# Altium PCB Board.PcbDoc
Units mil, origin at the board's own origin, x right, y up, seen from the top; angles counter-clockwise.
Board outline 760 x 1365 mil, 2 copper layers (Top Layer, Bottom Layer); 29 components, 22 nets, 136 pads, 50 vias.
Unrouted connection lines stored in the file: 3.
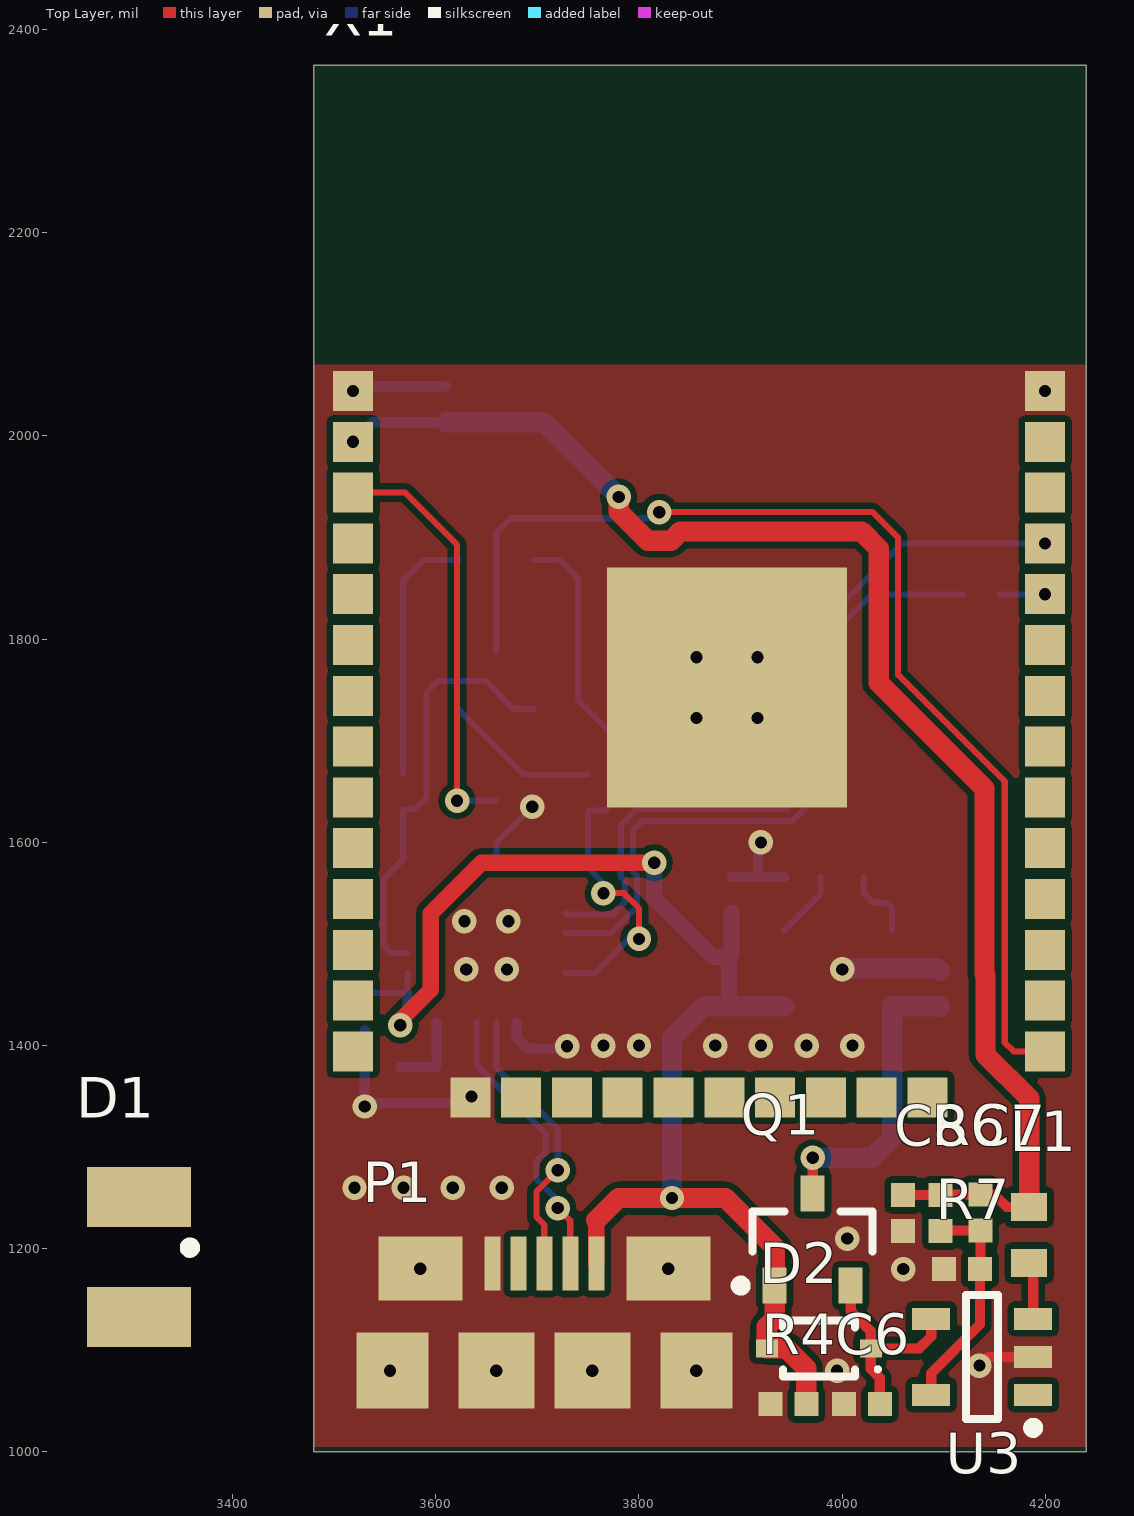
[diagram p0: Top Layer view]
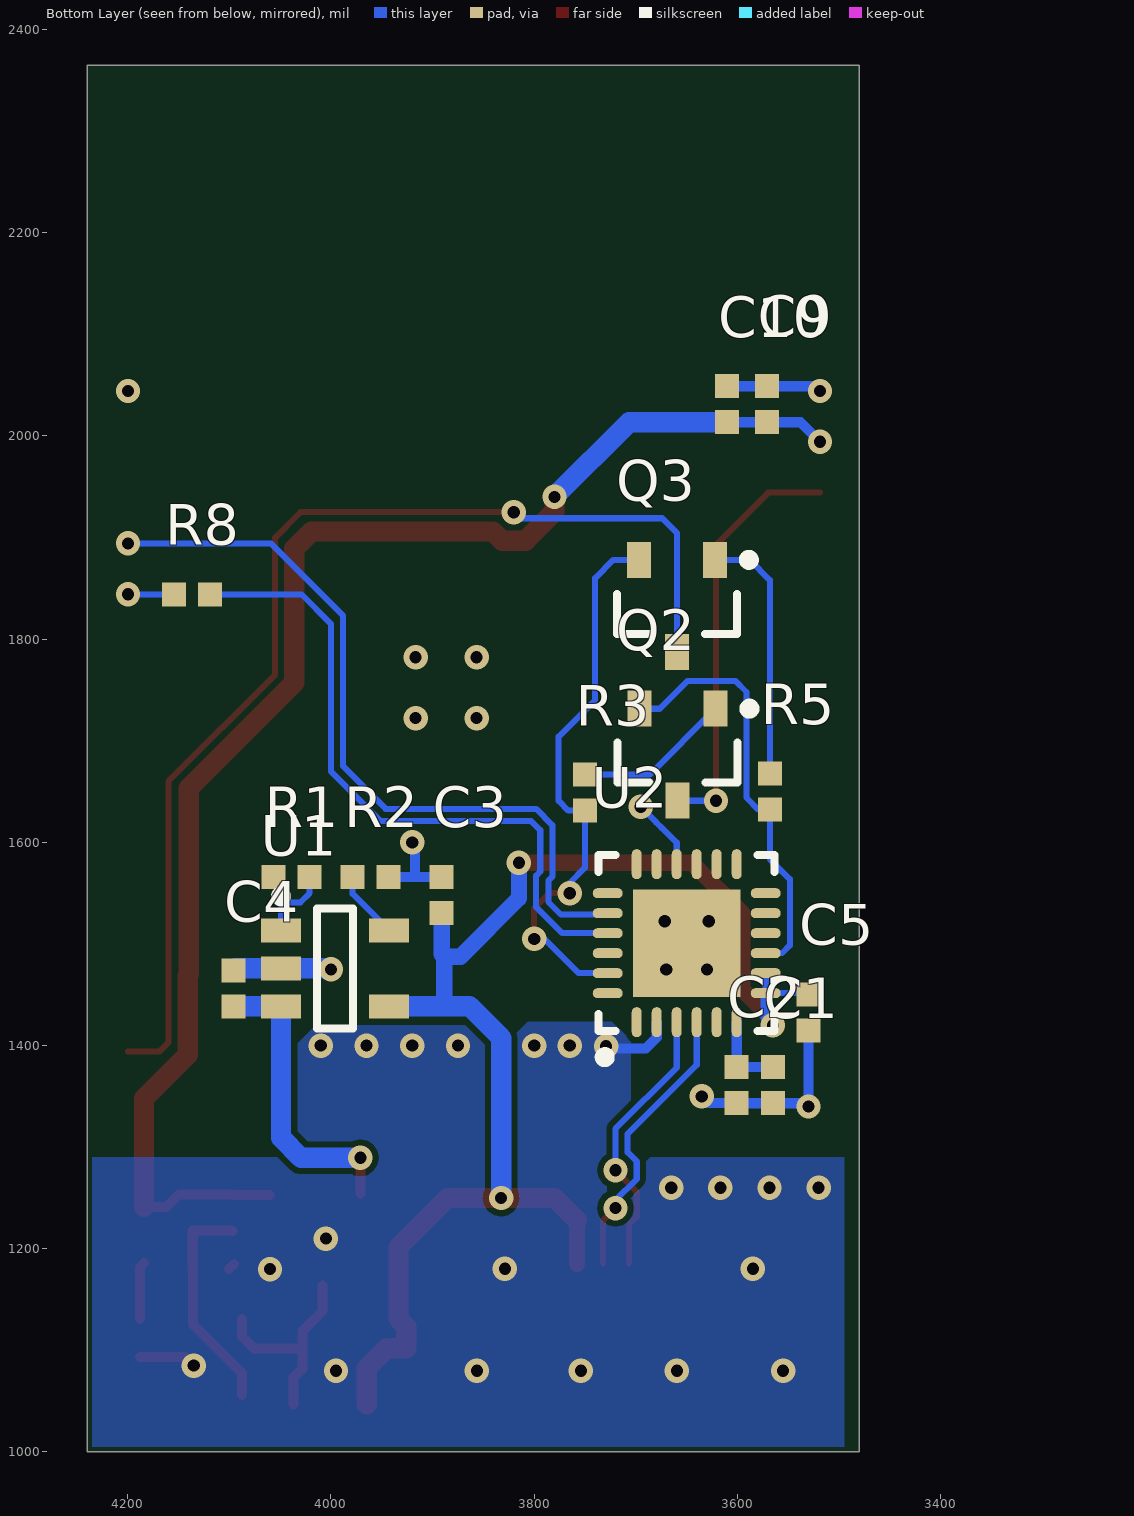
[diagram p1: Bottom Layer view, seen from below]

## Layer stack, top to bottom
Top Solder: solder mask 0.4, Solder Resist, Dk 3.5
Top Layer: signal copper 1.4
Dielectric 1: dielectric 12.6, FR-4, Dk 4.8
Bottom Layer: signal copper 1.4
Bottom Solder: solder mask 0.4, Solder Resist, Dk 3.5

## Board outline
3480,1000 4240,1000 4240,2365 3480,2365

## Design rules (kind name [scope] priority, off if disabled: settings)
Clearance [All] p1: gap=6 ignorepadtopadclearanceinfootprint=FALSE except(0: Arc-Hole Track-Hole SMDPad-Hole THPad-Hole Via-Hole Fill-Hole Poly-Hole Region-Hole Text-Hole)
PolygonConnect PolygonConnect_1 [InNetClass('PWR')] p1: connectstyle=Direct reliefconductorwidth=10 reliefentries=4 polygonreliefangle="90 Angle" airgapwidth=10
PolygonConnect [All] p2: connectstyle=Relief reliefconductorwidth=10 reliefentries=4 polygonreliefangle="90 Angle" airgapwidth=10
RoomDefinition Sheet1 [InComponentClass('Sheet1')] p1: confinementstyle=ConfineIn formatcopy=TRUE lockcomponents=FALSE outline 1005,1000 6995,1000 6995,4995 1005,4995
RoutingVias [All] p1: holewidth=12 width=24 viastyle="Through Hole" minholewidth=12 minwidth=24 maxholewidth=12 maxwidth=24
SolderMaskExpansion [All] p1: expansion=4
Width [All] p1: maxlimit=20 minlimit=6 preferedwidth=6 minimp=50.000000 maximp=50.000000 favimp=50.000000
30 further rules are at their usual default settings.

## Classes and differential pairs
net class PWR: 3.3V GND VBAT VBUS

## Components (designator, comment, footprint, x,y, rotation, side; value= is the part's Value field where it differs from the comment)
C1 "cap_single_np" chip_0402 3565,1361 r270 bottom
C2 "cap_single_np" chip_0402 3601,1361.28 r270 bottom
C3 "cap_single_np" chip_0402 3891,1548.28 r90 bottom
C4 "cap_single_np" chip_0402 4096,1456 r90 bottom
C5 "cap_single_np" chip_0402 3530,1432.72 r270 bottom
C6 "cap_single_np" chip_0402 4019.28,1047 r180 top
C7 "cap_single_np" chip_0402 4136,1235.72 r270 top
C8 "cap_single_np" chip_0402 4060,1235.28 r270 top
C9 "cap_single_np" chip_0402 3571,2031.28 r90 bottom
C10 "cap_single_np" chip_0402 3610,2031.28 r90 bottom
D1 "diode_4" plcc-2 3308,1251.11 r180 top
D2 "diode_2" sod323_0 3977,1102 r180 top
L1 "ind_1" chip_0603 4184,1213.56 r90 top
P1 "usb_micro_b" 10118192 3706.76,1185.32 r0 top
Q1 "p-mosfet_1" sot-23-3 3971,1209 r90 top
Q2 "npn-bjt_0" sot-23-3 3659,1686.28 r270 bottom
Q3 "npn-bjt_0" sot-23-3 3659.6,1832.72 r270 bottom
R1 "res_single" chip_0402 4038.72,1566 r180 bottom
R2 "res_single" chip_0402 3961,1566 r180 bottom
R3 "res_single" chip_0402 3750,1649 r90 bottom
R4 "res_single" chip_0402 3947,1047 r180 top
R5 "res_single" chip_0402 3568,1650 r90 bottom
R6 "res_single" chip_0402 4097,1235.28 r270 top
R7 "res_single" chip_0402 4118,1180 r180 top
R8 "res_single" chip_0402 4137,1844 r0 bottom
U1 "MCP73831" sot-23-5 3996,1476 r180 bottom
U2 "CP2104" QFN-24-4x4 3649.84,1500.76 r90 bottom
U3 "*" sot-25 4137.8,1093.6 r180 top
X1 "*" ESP32_WROOM 3518.65,1394.28 r0 top

## Footprints (in the part's own frame and the unit in brackets; to place one, negate y for a bottom-side part, rotate by r counter-clockwise, add the part's x,y. Pads: shape width x height; smd on the part's side, far side on the other; paste and mask are expansions set on the pad)
10118192 [mm] "USB Micro B Type Receptacle"
  rect 0.4x1.35 smd: 1(1.3,0) 2(0.65,0) 3(0,0) 4(-0.65,0) 5(-1.3,0)
  rect 1.8x1.9 smd: PAD(-3.8,-2.675) PAD(3.8,-2.675)
  rect 2.1x1.6 smd: PAD(-3.1,-0.125) PAD(3.1,-0.125)
  rect 1.9x1.9 smd: PAD(-1.2,-2.675) PAD(1.2,-2.675)
chip_0402 [mm]
  rect 0.6x0.6 smd: 1(-0.45,0) 2(0.45,0)
  body extent -0.55,-0.3 0.55,0.3, height 0.6
chip_0603 [mm]
  rect 0.7x0.9 smd: 1(-0.7,0) 2(0.7,0)
  body extent -0.85,-0.45 0.85,0.45, height 0.6
ESP32_WROOM [mm] "ESP32 WROOM Module Board"
  rect 1x1 smd: 1(0,16.51) 2(0,15.24) 3(0,13.97) 4(0,12.7) 5(0,11.43) 6(0,10.16) 7(0,8.89) 8(0,7.62) 9(0,6.35) 10(0,5.08) 11(0,3.81) 12(0,2.54) 13(0,1.27) 14(0,0) 15(2.93,-1.15) 16(4.2,-1.15) 17(5.47,-1.15) 18(6.74,-1.15) 19(8.01,-1.15) 20(9.28,-1.15) 21(10.55,-1.15) 22(11.82,-1.15) 23(13.09,-1.15) 24(14.36,-1.15) 25(17.3,0) 26(17.3,1.27) 27(17.3,2.54) 28(17.3,3.81) 29(17.3,5.08) 30(17.3,6.35) 31(17.3,7.62) 32(17.3,8.89) 33(17.3,10.16) 34(17.3,11.43) 35(17.3,12.7) 36(17.3,13.97) 37(17.3,15.24) 38(17.3,16.51)
  rect 6x6 smd: PAD(9.35,9.1)
plcc-2 [mm]
  rect 2.6x1.5 smd: 1(0,0) 2(0,3)
  silkscreen extent -1.4,1.14 -1.14,1.4
QFN-24-4x4 [mm] "QFN, 24-Leads, Body 4.00x4.00mm, Pitch 0.50mm, Thermal Pad 2.68x2.68mm, IPC Medium Density"
  oval 0.75x0.25 smd: 1(-1.975,1.25) 2(-1.975,0.75) 3(-1.975,0.25) 4(-1.975,-0.25) 5(-1.975,-0.75) 6(-1.975,-1.25) 13(1.975,-1.25) 14(1.975,-0.75) 15(1.975,-0.25) 16(1.975,0.25) 17(1.975,0.75) 18(1.975,1.25)
  oval 0.25x0.75 smd: 7(-1.25,-1.975) 8(-0.75,-1.975) 9(-0.25,-1.975) 10(0.25,-1.975) 11(0.75,-1.975) 12(1.25,-1.975) 19(1.25,1.975) 20(0.75,1.975) 21(0.25,1.975) 22(-0.25,1.975) 23(-0.75,1.975) 24(-1.25,1.975)
  rect 2.68x2.68 smd: 25(0,0)
  silkscreen extent -2.97,-2.2 2.2,2.2, body extent -2.05,-2.05 2.05,2.05, height 0.8
sod323_0 [mm] "SOD-323, 1.25mm x 1.7mm"
  rect 0.55x0.45 smd: 1(-1.3,0) 2(1.3,0)
  silkscreen extent -1.53,-0.7 0.9,0.7, body extent -0.9,-0.67 0.9,0.67, height 1
sot-23-3 [mm] "SOT-23-3 package"
  rect 0.9x0.6 smd: 1(-1.15,0.95) 2(-1.15,-0.95) 3(1.15,0)
  silkscreen extent -1.27,-1.5 0.7,1.92, body extent -0.7,-1.52 0.7,1.52, height 1.1
sot-23-5 [mm] "SOT23, 5-Leads, Body 2.90x2.80mm, Pitch 0.95mm, IPC Medium Density"
  rect 1x0.6 smd: 1(-1.35,0.95) 2(-1.35,0) 3(-1.35,-0.95) 4(1.35,-0.95) 5(1.35,0.95)
  silkscreen extent -1.48,-1.5 0.45,1.92, body extent -0.85,-1.5 0.85,1.5, height 1.1
sot-25 [mm] "SOT23 Package"
  rect 0.95x0.55 smd: 1(-1.275,0.95) 2(-1.275,0) 3(-1.275,-0.95) 4(1.275,-0.95) 5(1.275,0.95)
  silkscreen extent -1.4,-1.55 0.4,1.9, body extent -0.85,-1.55 0.85,1.55, height 1.4

## Part data
C1 C9: library part CAP-00127, "CAP, 4.7uF, 10%, 16V, X7R, 0805", Capacitance=4.7uF, Manufacturer=Murata, Manufacturer PN=GRM21BR71C475KA73L, Tolerance=10%, Voltage Rating=16V, Part Number=CAP-00127, Type=X7R
C2 C10: library part CAP-00069, "CAP, 0.10uF, 10%, 16V, X7R, 0805", Capacitance=0.10uF, Manufacturer=Murata, Manufacturer PN=GRM219R71C104KA01D, Tolerance=10%, Voltage Rating=16V, Part Number=CAP-00069, Type=X7R
C3 C4 C6 C8: library part CAP-00131, "CAP, 10uF, 10%, 10V, X7R, 0805", Capacitance=10uF, Manufacturer=Murata, Manufacturer PN=GRM21BR71A106KA73L, Tolerance=10%, Voltage Rating=10V, Part Number=CAP-00131, Type=X7R
C5: library part CAP-00107, "CAP, 1uF, 10%, 16V, X7R, 0805", Capacitance=1uF, Manufacturer=Murata, Manufacturer PN=GRM21BR71C105KA01L, Tolerance=10%, Voltage Rating=16V, Part Number=CAP-00107, Type=X7R
C7: library part CAP-00426, "CAP, 22pF, ±1%, 50V, C0G, 0603", Capacitance=22pF, Manufacturer=Murata, Manufacturer PN=GRM1885C1H220FA01D, Tolerance=±1%, Voltage Rating=50V, Part Number=CAP-00426, Type=C0G
D1: library part DIO-00034, "LED, Orange, PLCC-4", Current Rating=20mA, Forward Voltage=1.9V, Manufacturer=Avago, Manufacturer PN=HSML-A101-S00J1, Part Number=DIO-00034, Type=LED
D2: library part DIO-00000, "Dio Shtky, 500mA, 0.62V, 30V, SOD-323", Current Rating=500mA, Forward Voltage=620mV, Manufacturer="ON Semi", Manufacturer PN=NSR0530HT1G, Reverse Breakdown Voltage=30V, Part Number=DIO-00000, Type=Schottky
L1: library part MAG-00030, "Ind, 2.2uH, 20%, 500mA, 0805", Current Rating=500mA, Inductance=2.2uH, Manufacturer=TDK, Manufacturer PN=MLZ1608N2R2LT000, Tolerance=20%, DCR="234 mOhm", Part Number=MAG-00030
P1: library part CONN-00011, "USB Micro B Type Receptacle", Current=1.8, Manufacturer=Amphenol, Manufacturer PN=10118192, Levels=1, Part Number=CONN-00011, Positions per level=5, Type="USB Micro B"
Q1: library part XSTR-00005, "XSTR PMOS, 2.2A, 30V,  Vgs 1.4V, SOT-23-3", Manufacturer="ON Semi", Manufacturer PN=NTR4171PT1G, Max Current=2.2A, Max Power=480mW, Max Voltage=30V, Part Number=XSTR-00005, Type=PFET, Vgs/Vce=1.4V
Q2 Q3: library part XSTR-00001, "XSTR NPN, 600mA, 40V, Vce 0.75V, SOT-23-3", Manufacturer="ON Semi", Manufacturer PN=MMBT4401LT3G, Max Current=600mA, Max Power=300mW, Max Voltage=40V, Part Number=XSTR-00001, Type=NPN, Vgs/Vce=0.75V
R1: library part RES-00240, "RES, 1k, 1%, 125mW, 0805", Manufacturer=Rohm, Manufacturer PN=MCR10EZHF1001, Power Rating=125mW, Resistance=1k, Tolerance=1%, Part Number=RES-00240
R2: library part RES-00273, "RES, 2k, 1%, 125mW, 0805", Manufacturer=Rohm, Manufacturer PN=MCR10ERTF2001, Power Rating=125mW, Resistance=2k, Tolerance=1%, Part Number=RES-00273
R3 R5: library part RES-00356, "RES, 10k, 1%, 125mW, 0805", Manufacturer=Rohm, Manufacturer PN=MCR10EZPF1002, Power Rating=125mW, Resistance=10k, Tolerance=1%, Part Number=RES-00356
R4: library part RES-00432, "RES, 47k, 1%, 125mW, 0805", Manufacturer=Rohm, Manufacturer PN=MCR10ERTF4702, Power Rating=125mW, Resistance=47k, Tolerance=1%, Part Number=RES-00432
R6: library part RES-00532, "RES, 365k, 1%, 125mW, 0805", Manufacturer=Rohm, Manufacturer PN=MCR10ERTF3653, Power Rating=125mW, Resistance=365k, Tolerance=1%, Part Number=RES-00532
R7: library part RES-00459, "RES, 82k, 1%, 125mW, 0805", Manufacturer=Rohm, Manufacturer PN=MCR10ERTF8202, Power Rating=125mW, Resistance=82k, Tolerance=1%, Part Number=RES-00459
R8: library part RES-00202, "RES, 470, 1%, 125mW, 0805", Manufacturer=Rohm, Manufacturer PN=MCR10ERTF4700, Power Rating=125mW, Resistance=470, Tolerance=1%, Part Number=RES-00202
U1: library part PWREG-00011, "Single Cell Li-Ion Batt Charger, MCP73831, SOT-23-5", Manufacturer=Microchip, Max Current=500mA, Voltage Range In="3.75 - 6V", Manufacturer PN=MCP73831, Part Number=PWREG-00011, Reg Type="Batt Chgr"
U2: library part IFACE-00003, "USB to UART Bridge CP2104", Manufacturer=SiLabs, Manufacturer PN=CP2104, Part Number=IFACE-00003
U3: library part PWREG-00000, "REG, SW Buck Adj, 1A, 1.5MHz", Frequency=1.5MHz, Manufacturer="Diodes Inc.", Manufacturer PN=AP3428, Max Current=1A, Voltage Range In="2.5 - 5.5V", Voltage Range Out="0.6 - 5.5V", Fixed/Adj=Adj, Part Number=PWREG-00000, Reg Type="SW Buck"
X1: library part MISC-00003, "ESP32_WROOM", Manufacturer=Espressif, Manufacturer PN=ESP32_WROOM, Part Number=MISC-00003

## Via types
v1: diameter 24, hole 12, Top Layer to Bottom Layer, 50 vias

## Nets (pads, with @x,y where several pads share a name; then routed paths per layer and width w, separated by ;. In a path a pad name is that pad's centre, name@x,y a point inside that pad or via, vN(x,y) a via of type N, cw(c..) or ccw(c..) an arc to the next point about the centre after c; other vN are vias at no path point)
3.3V: C7.1 C8.1 C9.1 C10.1 L1.2 R6.1 X1.2 | length 1431.4
  Top Layer w10: C8.1 R6.1 4097.43,1253.43 C7.1 4149.69,1253.43 4162,1241.12 L1.2
  Top Layer w20: v1(3780,1940) 3780,1925.4 3807.7,1897.7 3808.4,1897 3831.6,1897 3840.6,1906 4019,1906 4036,1889 4036,1757.13 4140,1653.13 4140,1470 4141,1469 4141,1391.03 4184,1348.03 L1.2
  Bottom Layer w10: v1(3518.65,1994.28) 3537.94,2013.57 C9.1 C10.1
  Bottom Layer w20: C10.1 3706.43,2013.57 v1(3780,1940)
GND: C1.2 C2.2 C3.2 C4.2 C5.2 C6.2 C8.2 C9.2 C10.2 P1.5 P1.PAD R2.2 R4.2 R7.2 U1.2 U2.2 U2.16 U2.25 U3.2 X1.1 X1.15 X1.38 X1.PAD | length 668.8
  Top Layer w10: X1.15 v1(3635,1350) ; R7.2@4095.28,1185 R7.2 ; v1(4135,1085) 4143.6,1093.6 U3.2
  Bottom Layer w6: U2.16 3659.68,1599.68 3674.28,1614.28 3674.54,1614.28 3679.81,1619.56 3679.81,1619.81 v1(3695,1635)
  Bottom Layer w10: v1(3518.65,2044.28) 3523.37,2049 C9.2 C10.2 ; C5.2 v1(3530,1340) 3533.28,1343.28 C1.2 3600.72,1343.28 C2.2 3628.57,1343.57 v1(3635,1350) ; U2.2 3679.37,1407.87 3690,1397.24 3727.24,1397.24 v1(3729.24,1399.24) ; C3.2 3917.14,1566 ; v1(3920,1600) 3917.14,1597.14 3917.14,1566 ; R2.2 3917.14,1566
  Bottom Layer w20: v1(4000,1475) 4001,1476 U1.2 4093.72,1476 C4.2
  other v1: 3555,1080 3659.51,1080 3754,1080 3856.36,1080 3995,1080 3584.71,1180.39 3828.8,1180.39 4060,1180 4005,1210 3520,1260 3568.33,1260 3616.67,1260 3665,1260 3765,1400 3800,1400 3875,1400 3920,1400 3965,1400 4010,1400 3630,1475 3670,1475 3628.19,1522.41 3671.5,1522.41 3856.65,1722.28 3916.65,1722.28 3856.65,1782.28 3916.65,1782.28 4199.75,2044.28
NetC1_1: C1.1 C2.1 U2.5 U2.6 | length 80.3
  Bottom Layer w10: C1.1 3565.28,1379 C2.1 3600.63,1379.37 U2.6
NetC6_1: C6.1 D2.1 Q1.2 U3.4 | length 210.2
  Top Layer w10: Q1.2 4008.4,1138.6 4028.18,1118.82 D2.1 ; C6.1 4037,1073 4028.18,1081.82 D2.1 ; U3.4 4087.61,1113.61 4076,1102 D2.1
NetC7_2: C7.2 R6.2 R7.1 U3.5 | length 221
  Top Layer w10: U3.5 4087.61,1077.61 4135.72,1125.72 R7.1 4136,1180.28 C7.2 4097.43,1218 R6.2
NetD1_1: D1.1 R1.1
NetL1_1: L1.1 U3.3 | length 56.7
  Top Layer w10: L1.1 4188,1182 U3.3
NetP1_2: P1.2 U2.4 | length 283.4
  Top Layer w6: v1(3720,1240) 3732.35,1227.65 P1.2
  Bottom Layer w6: U2.4 3640,1381.03 3708,1313.03 3708,1295 3699,1286 3699,1268.6 3720,1247.6 v1(3720,1240)
NetP1_3: P1.3 U2.3 | length 274.6
  Top Layer w6: P1.3 3706.76,1223.55 3699,1231.3 3699,1256.3 v1(3720,1277.3)
  Bottom Layer w6: U2.3 3659.68,1378.32 3720,1318 v1(3720,1277.3)
NetQ2_1: Q2.1 R3.2 | length 155.3
  Bottom Layer w6: Q2.1 3686.43,1666.72 R3.2
NetQ2_2: Q2.2 R5.1 U2.9 | length 421.9
  Bottom Layer w6: U2.9 3556.09,1490.91 3548.32,1498.68 3548.32,1563.89 3568,1583.57 R5.1 3579.28,1632.28 3591,1644 3591,1748 3602,1759 3649,1759 3676.45,1731.55 Q2.2
NetQ2_3: Q2.3 X1.3 | length 413.6
  Top Layer w6: X1.3 3569.72,1944.28 3621,1893 v1(3621,1641)
  Bottom Layer w6: v1(3621,1641) Q2.3
NetQ3_1: Q3.1 R5.2 | length 252.8
  Bottom Layer w6: R5.2 3568,1858 3588,1878 Q3.1
NetQ3_2: Q3.2 R3.1 U2.23 | length 559.5
  Top Layer w6: v1(3765,1550) 3785,1550 3800,1535 v1(3800,1505)
  Bottom Layer w6: Q3.2 3722,1878 3740,1860 3740,1740 3776,1704 3776,1641 3766.28,1631.28 R3.1 3750,1575 3765,1560 v1(3765,1550) ; U2.23 3756.23,1471.23 3790,1505 v1(3800,1505)
NetQ3_3: Q3.3 X1.25 | length 1115.2
  Top Layer w6: v1(3820,1925) 4030,1925 4055,1900 4055,1765 4160,1660 4160,1402.98 4168.7,1394.28 X1.25
  Bottom Layer w6: Q3.3 3659.6,1904.6 3674,1919 3814,1919 v1(3820,1925)
NetR1_2: R1.2 U1.1 | length 72.5
  Bottom Layer w6: R1.2 4021,1550 4030,1541 4044,1541 4049.15,1535.85 U1.1
NetR2_1: R2.1 U1.5 | length 67.5
  Bottom Layer w6: U1.5 3978.72,1549.27 R2.1
NetR8_1: R8.1 U2.21 | length 664.7
  Bottom Layer w6: U2.21 3772.27,1510.6 3798,1536.33 3798,1567.3 3794,1571.3 3794,1612.03 3802.97,1621 3951,1621 4000,1670 4000,1815 4029,1844 R8.1
NetR8_2: R8.2 X1.34 | length 45.1
  Bottom Layer w6: R8.2 4199.47,1844 v1(4199.75,1844.28)
NetU2_20: U2.20 X1.35 | length 760.7
  Bottom Layer w6: U2.20 3728.88,1529 3773.7,1529 3786,1541.3 3786,1562.33 3782,1566.33 3782,1617 3798,1633 3946.03,1633 3988,1674.97 3988,1823 4059.28,1894.28 v1(4199.75,1894.28)
VBAT: C4.1 Q1.3 U1.3 | length 299.4
  Top Layer w10: v1@3970,1288.55 v1(3971,1289.55) Q1.3
  Bottom Layer w20: v1(3971,1289.55) 4029.55,1289.55 4049.15,1309.15 U1.3 4095.68,1438.6 C4.1
VBUS: C3.1 C5.1 D1.2 D2.2 P1.1 Q1.1 R4.1 U1.4 U2.7 U2.8 | length 1399
  Top Layer w10: v1(3565,1420) v1@3565,1425
  Top Layer w16: v1@3565,1425 3595,1455 3595,1530 3645,1580 v1(3815,1580) ; P1.1 3757.94,1227.94
  Top Layer w20: 3757.94,1227.94 3780,1250 v1(3832.5,1250) 3885,1250 3933.6,1201.4 Q1.1 3933.6,1131 3925.82,1123.22 D2.2 3945,1102 3964.72,1082.28 R4.1
  Bottom Layer w6: C5.1 3531.11,1451.54 U2.7 U2.8
  Bottom Layer w10: v1(3565,1420) 3572.09,1427.09 U2.7 ; 3888.5,1440.1 3890,1438.6
  Bottom Layer w16: v1(3815,1580) 3815,1545 3872.5,1487.5 3888.5,1487.5 ; 3888.5,1440.1 3888.5,1487.5 ; C3.1 3891,1490 3888.5,1487.5
  Bottom Layer w20: v1(3832.5,1250) 3832.5,1407.5 3863.6,1438.6 3890,1438.6 U1.4
pads on no net: P1.4 U2.1 U2.10 U2.11 U2.12 U2.13 U2.14 U2.15 U2.17 U2.18 U2.19 U2.22 U2.24 U3.1 X1.4 X1.5 X1.6 X1.7 X1.8 X1.9 X1.10 X1.11 X1.12 X1.13 X1.14 X1.16 X1.17 X1.18 X1.19 X1.20 X1.21 X1.22 X1.23 X1.24 X1.26 X1.27 X1.28 X1.29 X1.30 X1.31 X1.32 X1.33 X1.36 X1.37

## Polygon pours and split planes (outlines as drawn)
GND on Bottom Layer "GND_L02_P008" (solid, pour order 8): 3705,1283.49 3705,1405 3723.49,1423.49 3806.52,1423.49 3821.52,1408.49 3821.52,1283.49
GND on Bottom Layer "GND_L02_P004" (solid, pour order 4): 3845,1280 3845,1400 3865,1420 4015,1420 4035,1400 4035,1280
GND on Bottom Layer "GND_L02_P002" (solid, pour order 2): 4235,1290 4235,1005 3495,1005 3495,1290
GND on Top Layer "Top Layer-No Net" (solid, pour order 0): 3480,2070 3480,1005 4240,1005 4240,2070